# Altium PCB PGA309_Ref_v2.2.PcbDoc
Units mil, origin at the board's own origin, x right, y up, seen from the top; angles counter-clockwise.
Board outline 1000 x 1000 mil, 2 copper layers (Top Layer, Bottom Layer), stack 62 mil thick; 34 components, 25 nets, 97 pads, 22 vias.
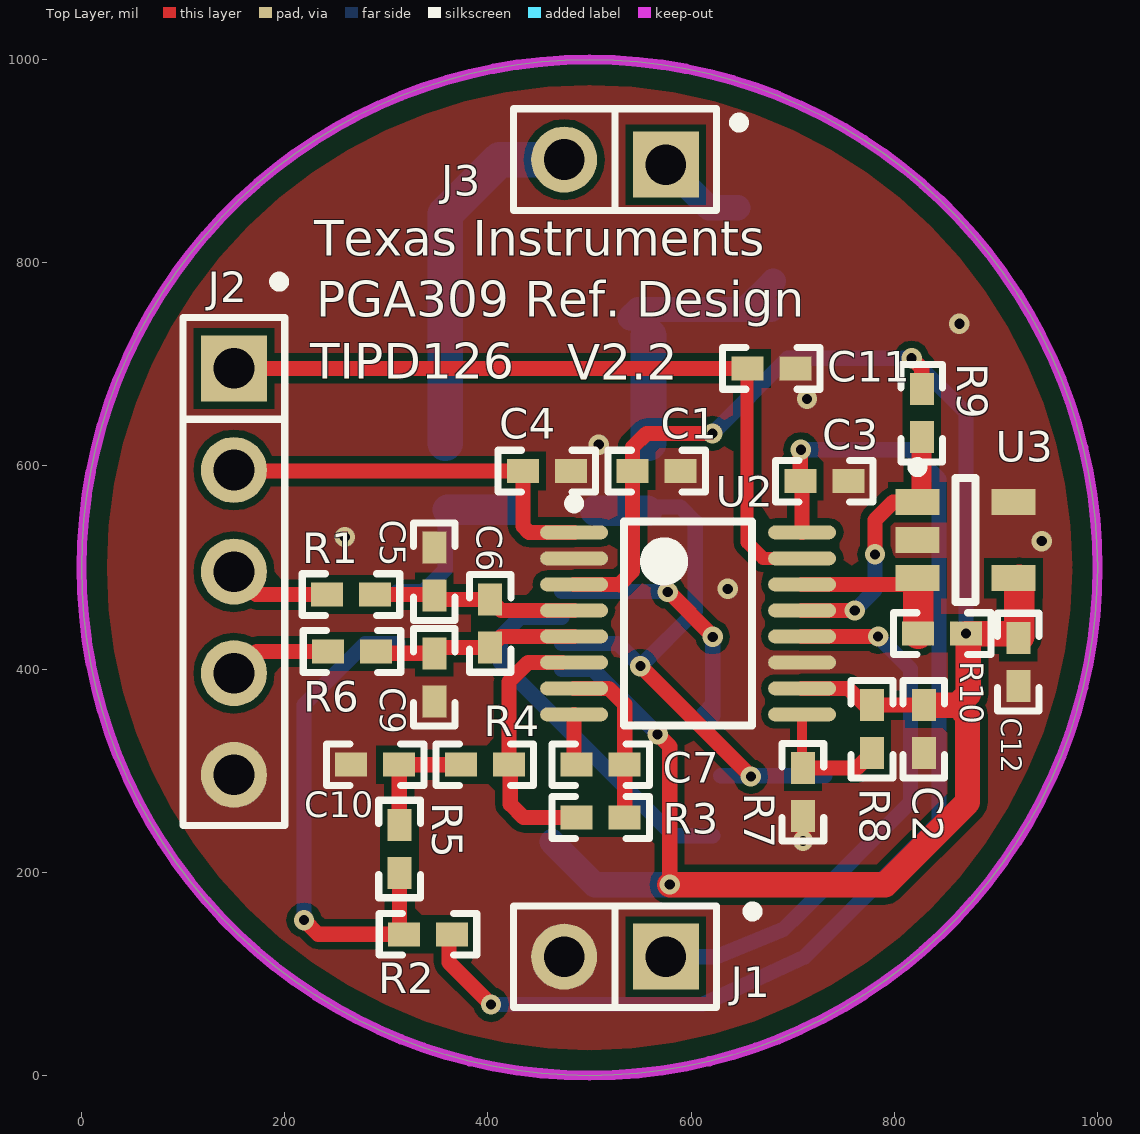
[diagram p0: Top Layer view]
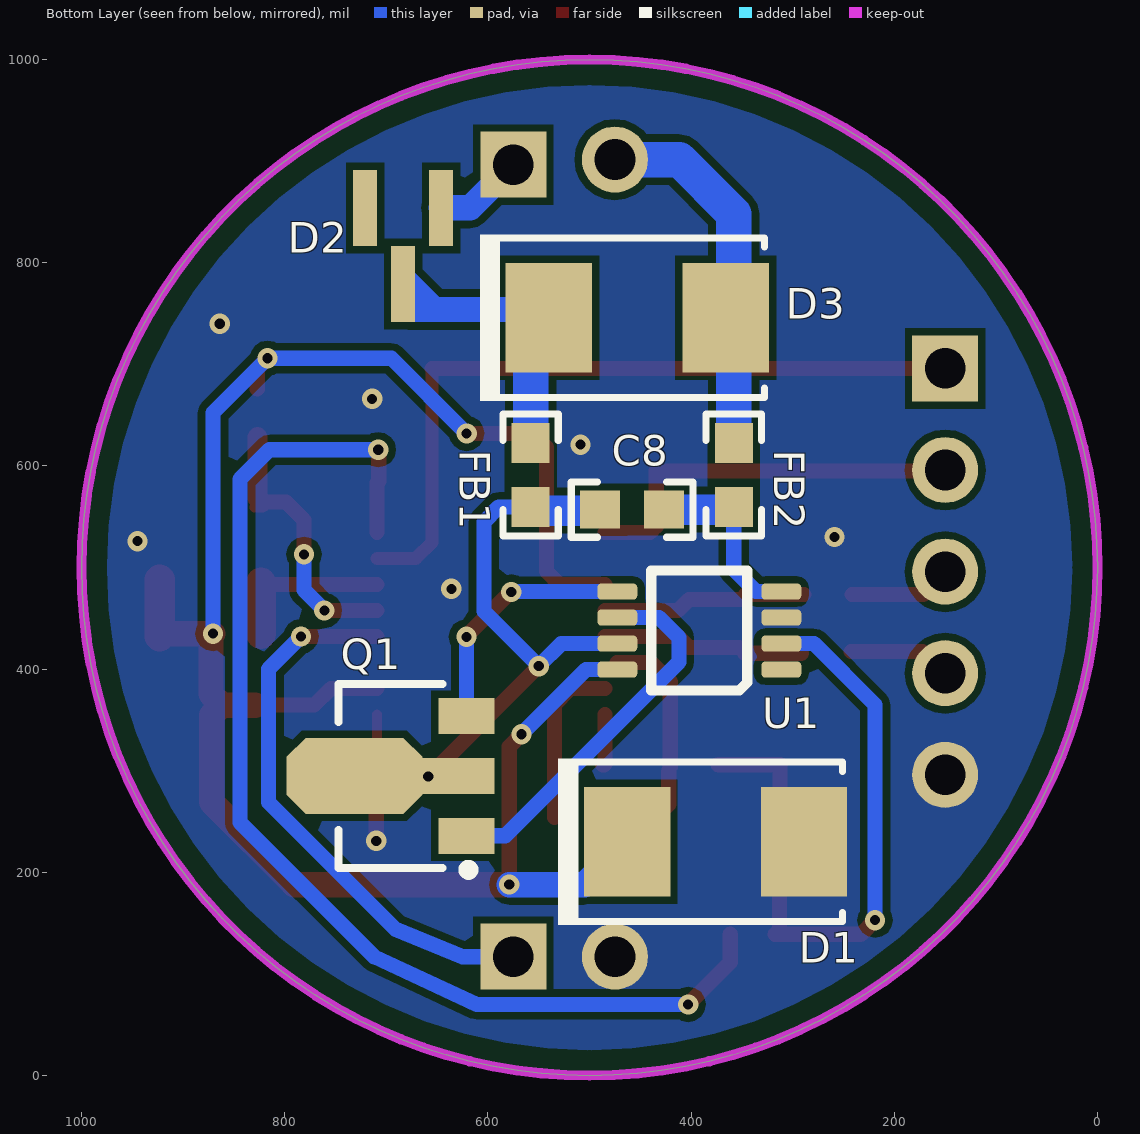
[diagram p1: Bottom Layer view, seen from below]

## Layer stack, top to bottom
Top Layer: signal copper 1.4
Dielectric: core 59.2, FR-4, Dk 4.8
Bottom Layer: signal copper 1.4

## Board outline
500,0 cw(c500,500) 0,500 cw(c500,500) 500,1000 cw(c500,500) 1000,500 cw(c500,500)

## Design rules (kind name [scope] priority, off if disabled: settings)
AcuteAngle [All] p1: minimum=2.00000000000000E+0001 checktracksonly=FALSE
AssemblyTestPointUsage [All] p1: valid=2
Clearance Clearance_BoardEdge_MountingHoles [OnCopper and InComponentClass('Mounting Holes') vs IsKeepOut] p1: gap=30
Clearance Clearance_BoardEdge_Poly [OnCopper and InPoly vs IsKeepOut] p2: gap=20
Clearance Clearance_BoardEdge [OnCopper and Not InComponentClass('Logo') and not InComponentClass('FiducialMark') and not InRegion(1000,500,4000,800) vs IsKeepOut] p3: gap=8
Clearance [All] p4: gap=7
ComponentClearance ComponentClearance_Logo [All] p1: gap=10 collisioncheckmode=3 verticalgap=0 showdistances=FALSE
ComponentClearance ComponentClearance_ScrewToNut [(HasFootprint('NY PMS 440 0025 PH')) vs (HasFootprint('Keystone_1902C'))] p2: gap=5 collisioncheckmode=3 verticalgap=10 showdistances=FALSE
ComponentClearance ComponentClearance_MountingHoles [InComponentClass('Mounting Holes')] p3: gap=25 collisioncheckmode=3 verticalgap=0 showdistances=FALSE
ComponentClearance ComponentClearance_SmallPassives [HasFootprint('0201*') or HasFootprint('0402*') or HasFootprint('0508') or HasFootprint('0603*') or HasFootprint('0612') or HasFootprint('0805*') or HasFootprint('0815*') or HasFootprint('0830*') or HasFootprint('1206*') or HasFootprint('1210*') or HasFootprint('1808*') or HasFootprint('1812*') or HasFootprint('1825*') or HasFootprint('2010*') or HasFootprint('2220*') or HasFootprint('2225*') or HasFootprint('2512*') or HasFootprint('2728*') or HasFootprint('3518*') vs HasFootprint('0201*') or HasFootprint('0402*') or HasFootprint('0508') or HasFootprint('0603*') or HasFootprint('0612') or HasFootprint('0805*') or HasFootprint('0815*') or HasFootprint('0830*') or HasFootprint('1206*') or HasFootprint('1210*') or HasFootprint('1808*') or HasFootprint('1812*') or HasFootprint('1825*') or HasFootprint('2010*') or HasFootprint('2220*') or HasFootprint('2225*') or HasFootprint('2512*') or HasFootprint('2728*') or HasFootprint('3518*')] p4: gap=10 collisioncheckmode=3 verticalgap=10 showdistances=FALSE
ComponentClearance ComponentClearance_THtoSMT [IsThruComponent vs IsSMTComponent] p5: gap=10 collisioncheckmode=3 verticalgap=0 showdistances=FALSE
ComponentClearance ComponentClearance_THtoTH [IsThruComponent vs IsThruComponent] p6: gap=118.11 collisioncheckmode=3 verticalgap=0 showdistances=FALSE
ComponentClearance [All] p7: gap=10 collisioncheckmode=3 verticalgap=10 showdistances=FALSE
DiffPairsRouting [All] p1: maxlimit=100 minlimit=10 mostfreqgap=10 maxuncoupledlength=1000
FabricationTestPointUsage TestPointUsage [All] p1: valid=2 allowmultiple=FALSE
FabricationTestpoint Testpoint [All] p1: side=3 testpointundercomponent=TRUE minsize=40 maxsize=100 preferedsize=60 minholesize=0 maxholesize=40 preferedholesize=32 testpointgrid=1 allowsidetop=TRUE allowsidebottom=TRUE usegrid=TRUE gridtolerance=0.01
FanoutControl Fanout_LCC [IsLCC] p1: bgadir=Out bgaviamode=Centered fanoutstyle=Auto fanoutdirection=Alternating viagrid=1 // Fanout_LCC (Default Rule)
FanoutControl Fanout_BGA [IsBGA] p2: bgadir=Out bgaviamode=Centered fanoutstyle=Auto fanoutdirection=Alternating viagrid=1 // Fanout_BGA (Default Rule)
FanoutControl Fanout_Default [All] p4: bgadir=Out bgaviamode=Centered fanoutstyle=Auto fanoutdirection=Alternating viagrid=1 // Fanout_Default (Default Rule)
FanoutControl Fanout_Small [(CompPinCount < 5)] p5: bgadir=Out bgaviamode=Centered fanoutstyle=Auto fanoutdirection=OutThenIn viagrid=1 // Fanout_Small (Default Rule)
HoleSize [All] p1: absolutevalues=TRUE maxlimit=251 minlimit=8 maxpercent=80.000 minpercent=20.000
MinimumAnnularRing [All] p1: minimumring=5
MinimumSolderMaskSliver MinimumSolderMaskSliver_Logo [InComponentClass('Logo') vs InComponentClass('Logo')] p1: minsoldermaskwidth=0.7
MinimumSolderMaskSliver [All] p2: minsoldermaskwidth=4
PlaneConnect [All] p1: planeconnectstyle=Relief reliefexpansion=10 reliefentries=4 reliefconductorwidth=10 reliefairgap=10
PolygonConnect [All] p1: connectstyle=Direct reliefconductorwidth=10 reliefentries=4 polygonreliefangle="90 Angle" airgapwidth=10
RoutingVias [All] p1: holewidth=16 width=34 viastyle="Through Hole" minholewidth=8 minwidth=8 maxholewidth=40 maxwidth=65
SMDToCorner [All] p1: distance=30000
SilkToSilkClearance [All] p1: silktosilkclearance=3
SilkscreenOverComponentPads [All] p1: minsilkscreentomaskgap=3
SolderMaskExpansion [All] p1: expansion=3
Width [All] p1: maxlimit=100 minlimit=6 preferedwidth=10 checkconnectedcopper=TRUE
14 further rules are at their usual default settings.

## Classes and differential pairs
component class Header: J1 J2 J3

## Components (designator, comment, footprint, x,y, rotation, side; value= is the part's Value field where it differs from the comment)
C1 "Used in BOM report" 0402 566,595 r180 top
C2 "Used in BOM report" 0402 829,341 r90 top
C3 "Used in BOM report" 0402 731,585 r0 top
C4 "Used in BOM report" 0402 458,595 r180 top
C5 "Used in BOM report" 0402 347.2,496 r270 top
C6 "Used in BOM report" 0402 402.2,445 r270 top
C7 "Used in BOM report" 0402 511,306 r0 top
C8 "Used in BOM report" 0603 458,557 r180 bottom
C9 "Used in BOM report" 0402 347.2,392 r270 top
C10 "Used in BOM report" 0402 289,306 r180 top
C11 "Used in BOM report" 0402 679,696 r0 top
C12 "Used in BOM report" 0402 922,407 r270 top
D1 "SMBJ5V0CA" SMB 376,230 r180 bottom
D2 "BAS70-TP" PCBComponent_1 646,854 r0 bottom
D3 "SMBJ40CA" SMB 453,746 r180 bottom
FB1 "Used in BOM report" 0603 558,591 r90 bottom
FB2 "Used in BOM report" 0603 358,591 r90 bottom
J1 "TSW-102-07-G-S" TSW-102-07-G-S#1 525,117 r180 top
J2 "TSW-105-07-G-S" TSW-105-07-G-S 150,496 r270 top
J3 "TSW-102-07-G-S" TSW-102-07-G-S#2 525,901.57 r180 top
Q1 "FCX690BTA" SOT-89-3 696,295 r0 bottom
R1 "Used in BOM report" 0402 265.2,473.39 r0 top
R2 "Used in BOM report" 0402 341,139 r180 top
R3 "Used in BOM report" 0402 511,254 r0 top
R4 "Used in BOM report" 0402 397,306 r0 top
R5 "Used in BOM report" 0402 313,223 r90 top
R6 "Used in BOM report" 0402 266.2,417.39 r0 top
R7 "Used in BOM report" 0402 710,279 r90 top
R8 "Used in BOM report" 0402 778,341 r270 top
R9 "Used in BOM report" 0402 827,652 r90 top
R10 "Used in BOM report" 0402 847,435 r0 top
U1 "XTR117" DGK-8 392,438 r0 bottom
U2 "PGA309" PW0016A_N 597,445 r0 top
U3 "24LC16BE" MF05A_N 870,527 r0 top

## Footprints (in the part's own frame and the unit in brackets; to place one, negate y for a bottom-side part, rotate by r counter-clockwise, add the part's x,y. Pads: shape width x height; smd on the part's side, far side on the other; paste and mask are expansions set on the pad)
0402 [mm] "0402 from SM-752 data"
  rect 0.8x0.6 smd: 1(-0.6,0) 2(0.6,0)
  silkscreen extent -1.22,-0.52 1.22,0.52, body extent -0.55,-0.3 0.55,0.3, height 0.6
0603 [mm] "0603 from SM-752 data"
  rect 1x0.95 smd: 1(-0.8,0) 2(0.8,0)
  silkscreen extent -1.52,-0.69 1.52,0.69, body extent -0.87,-0.47 0.87,0.47, height 0.85
DGK-8 [mm] "MSOP-8, SMD, 0.65mm PITCH"
  rrect50% 1x0.4 smd: 1(-2.05,0.975) 2(-2.05,0.325) 3(-2.05,-0.325) 4(-2.05,-0.975) 5(2.05,-0.975) 6(2.05,-0.325) 7(2.05,0.325) 8(2.05,0.975)
  silkscreen extent -1.2,-1.5 1.2,1.5
MF05A_N [mm] "SOT23, 5-Leads, Body 2.9x1.6mm, Pitch 0.95mm, Lead Span 2.8mm, IPC Medium Density"
  rect 1.1x0.65 smd: 1(-1.2,0.95) 2(-1.2,0) 3(-1.2,-0.95) 4(1.2,-0.95) 5(1.2,0.95)
  silkscreen extent -1.32,-1.55 0.25,1.95, body extent -0.9,-1.55 0.9,1.55, height 1.19
PCBComponent_1 [mm]
  rect 0.6x1.9 smd: 1(0,0) 2(1.9,0) 3(0.95,1.9)
PW0016A_N [mm] "TSOP, 16-Leads, Body 5x4.4mm, Pitch 0.65mm, IPC Medium Density"
  oval 1.7x0.35 smd: 1(-2.85,2.275) 2(-2.85,1.625) 3(-2.85,0.975) 4(-2.85,0.325) 5(-2.85,-0.325) 6(-2.85,-0.975) 7(-2.85,-1.625) 8(-2.85,-2.275) 9(2.85,-2.275) 10(2.85,-1.625) 11(2.85,-0.975) 12(2.85,-0.325) 13(2.85,0.325) 14(2.85,0.975) 15(2.85,1.625) 16(2.85,2.275)
  silkscreen extent -2.97,-2.55 1.6,3.12, body extent -2.25,-2.55 2.25,2.55, height 1.2
SMB [mil] "Molded Diode, 2-Leads, Body 5.4x3.6mm, IPC Medium Density, based on OnSemi component dimensions"
  rect 85x107.99 smd: 1(-87.01,0) 2(87.01,0)
  silkscreen extent -155,-82 125,82, body extent -106,-71 106,71, height 91
SOT-89-3 [mm] "SOT, 3-Leads, Body 4.6 x 2.6 mm, Pitch 1.5mm"
  rect 1.4x0.9 smd: 1(-1.9,1.5) 3(-1.9,-1.5)
  rect 1.8x0.9 smd: 2(-1.7,0)
  oct 3.4x1.9 smd: 4(0.9,0)
  silkscreen extent -2.07,-2.3 1.3,2.47, body extent -2.42,-2.28 1.83,2.32, height 1.62
TSW-102-07-G-S#1 [mm] "Samtec 100mil, 1x2, 230 mil above insulator"
  rect 1.65x1.65 hole 1.016 mask+0: 1(-1.27,0)
  round 1.65 hole 1.016 mask+0: 2(1.27,0)
  silkscreen extent -3.57,-1.27 2.54,1.27, body extent -2.54,-1.27 2.54,1.27, height 8.38
TSW-102-07-G-S#2 [mm] "Samtec 100mil, 1x2, 230 mil above insulator"
  rect 1.65x1.65 hole 1.016 mask+0: 1(-1.27,0.127)
  round 1.65 hole 1.016 mask+0: 2(1.27,0)
  silkscreen extent -3.23,-1.27 2.54,1.27, body extent -2.54,-1.27 2.54,1.27, height 8.38
TSW-105-07-G-S [mm] "Samtec 100mil, 1x5, 230 mil above insulator"
  rect 1.65x1.65 hole 1.016 mask+0: 1(-5.08,0)
  round 1.65 hole 1.016 mask+0: 2(-2.54,0) 3(0,0) 4(2.54,0) 5(5.08,0)
  silkscreen extent -7.37,-1.27 6.35,1.27, body extent -6.35,-1.27 6.35,1.27, height 8.38

## Part data
C1 C2 C3 C4 C5 C6 C7 C8 C9 C10 C11 C12: library part Capacitor, "CAP, CERM, xxxF, xxV, [TempCo], xx%, [PackageReference]"
D1 D3: library part TVS_BI_SMB
D2: library part Component_1
FB1 FB2: library part Ferrite_Bead, "300mA Ferrite Bead, 600 ohm @ 100MHz"
J1 J3: "Header, TH, 100mil, 2x1, Gold plated, 230 mil above insulator"
J2: "Header, TH, 100mil, 5x1, Gold plated, 230 mil above insulator"
Q1: library part "FCX690BTA, Diodes Inc.", "Transistor, NPN, 45V, 1A, SOT-89"
R1 R2 R3 R4 R5 R6 R7 R8 R9 R10: library part Resistor, "RES, xxx ohm, x%, xW, [PackageReference]"
U1: library part XTR117_MSOP
U2: library part PGA309_TSSOP16
U3: library part 24LC16BE_SOT-23

## Via types
v1: diameter 20, hole 10, Top Layer to Bottom Layer, 22 vias

## Nets (pads, with @x,y where several pads share a name; then routed paths per layer and width w, separated by ;. In a path a pad name is that pad's centre, name@x,y a point inside that pad or via, vN(x,y) a via of type N, cw(c..) or ccw(c..) an arc to the next point about the centre after c; other vN are vias at no path point)
1W: J1.1 U2.12 | length 559.9
  Top Layer w15: U2.12 v1(784,432.2)
  Bottom Layer w10: J1.1@578,119 J1.1@585.5,126.5
  Bottom Layer w15: J1.1 625,117 691,144 706,159 816,269 816,400.2 v1(784,432.2)
GND: C1.1 C2.1 C3.2 C4.1 C5.1 C9.2 C10.2 C11.2 C12.2 D1.2 J1.2 J2.5 R7.1 U1.3 U2.2 U2.11 U3.2 U3.5 | length 25.4
  Top Layer w15: v1(710,231) R7.1 ; v1(945,526) v1@945,527
  other v1: 636,479 259,530 509,621 714,666 864,740
LOOP+: D2.1 J3.1 | length 88.6
  Bottom Layer w25: J3.1 617.57,854 D2.1
LOOP-: D3.2 FB2.2 J3.2 | length 369.5
  Bottom Layer w25: J3.2 471.57,901.57 J3.2@475,905
  Bottom Layer w35: FB2.2 358,738.01 358,848 411.57,901.57 J3.2@471.57,901.57
NetC5_2: C5.2 C6.1 R1.2 U2.4 | length 202.4
  Top Layer w10: C5.2@346.2,473.39 C5.2 C5.2@350.96,468.62
  Top Layer w15: R1.2 C5.2@346.2,473.39 ; C5.2@350.96,468.62 C6.1 413.03,457.8 U2.4
NetC6_2: C6.2 C9.1 R6.2 U2.5 | length 202.6
  Top Layer w10: R6.2 R6.2@291.59,415.62 ; C9.1 C9.1@352.96,421.38
  Top Layer w15: R6.2@291.59,415.62 C9.1 ; C9.1@352.96,421.38 C6.2 413.03,432.2 U2.5
NetC7_1: C7.1 U2.8 | length 51.3
  Top Layer w15: C7.1@484.8,306.58 C7.1@485.38,306 ; U2.8 484.8,308.58 C7.1
NetC7_2: C7.2 R3.2 U2.7 | length 167.7
  Top Layer w15: U2.7 518.98,381.02 534.62,365.38 C7.2 R3.2
NetC8_1: C8.1 FB1.1 Q1.2 Q1.4 U1.7 | length 610.5
  Top Layer w15: v1(550,403) v1(658.73,294.27)
  Bottom Layer w15: U1.7 527.8,425.2 v1(550,403) 604,457 604,545 589.5,559.5 FB1.1 ; Q1.2 Q1.4
  Bottom Layer w30: C8.1@505.5,556 FB1.1@557,556
NetC8_2: C8.2 FB2.1 U1.4 | length 183.2
  Bottom Layer w15: U1.4 336.39,476.39 358,498 FB2.1
  Bottom Layer w30: FB2.1@360.5,557 C8.2
NetC10_1: C10.1 R4.1 R5.2 | length 120.3
  Top Layer w10: R5.2@312.62,247 R5.2
  Top Layer w15: R5.2@312.62,247 C10.1 R4.1
NetD2_3: D2.3 D3.1 FB1.2 | length 287
  Bottom Layer w25: D3.1 548,753.99 653.2,753.99 ; D2.3@679,753.99 653.2,753.99 ; D2.3@680.9,781.7 653.2,753.99
  Bottom Layer w35: FB1.2 D3.1@558,728.01
NetQ1_1: Q1.1 U1.6 | length 373.1
  Bottom Layer w15: U1.6 431.62,450.8 412,431.17 412,407 583.06,235.94 Q1.1
NetQ1_3: Q1.3 U1.5 | length 257.7
  Top Layer w15: v1(577,476) 578,476 v1@621.7,432.3
  Bottom Layer w15: U1.5 576.61,476.39 v1(577,476) ; Q1.3@612.2,356.06 Q1.3@621.2,365.06 ; Q1.3 Q1.3@621.2,365.06 ; v1(621.2,431.8) Q1.3@621.2,365.06
NetR2_2: R2.2 R5.1 U1.2 | length 494.4
  Top Layer w10: R2.2@311.62,139 R2.2@313,140.38
  Top Layer w15: v1(219,153) 233,139 311.62,139 R2.2 ; R2.2@313,140.38 R5.1
  Bottom Layer w15: v1(219,153) 219,365 279.2,425.2 U1.2
NetR3_1: R3.1 R4.2 U2.6 | length 250.7
  Top Layer w10: R4.2@418.12,303.5 R4.2@422,299.62
  Top Layer w15: R4.2 420.62,387.62 439.61,406.61 U2.6@473,406.61 ; R4.2@422,299.62 422,267 435,254 R3.1
NetR7_2: R7.2 R8.2 U2.9 | length 127.3
  Top Layer w10: U2.9 709.2,303.42 R7.2
  Top Layer w15: R7.2 763.24,302.62 R8.2
SCL: R9.1 U2.13 U3.1 | length 272.1
  Top Layer w10: U3.1@822.76,559.4 U3.1@829.76,559.4 ; R9.1@826.76,629.38 826.76,628.13 R9.1
  Top Layer w15: U2.13 v1(761,457.8) ; v1(781,513) 781,546.8 798.6,564.4 U3.1
  Top Layer w20: U3.1 826.76,568.4 R9.1@826.76,628.13
  Bottom Layer w15: v1(761,457.8) 781,477.8 v1(781,513)
SDA: R10.1 U2.14 U3.3 | length 165.3
  Top Layer w10: U3.3@820.54,483.39 822.76,485.6 U3.3@823.38,484.98
  Top Layer w15: U2.14 U3.3@820.54,483.39
  Top Layer w30: R10.1 U3.3@823.38,484.98
VEXC: C4.2 J2.2 U2.1 | length 391.7
  Top Layer w15: J2.2@150,595 C4.2 434.38,540.62 440.43,534.57 U2.1
VIN1: J2.3 R1.1 | length 100.5
  Top Layer w15: J2.3@150,495 171.61,473.39 R1.1
VIN2: J2.4 R6.1 | length 101.9
  Top Layer w15: J2.4@150,395 172.39,417.39 R6.1
VREF: C3.1 R2.1 U2.16 | length 1160.4
  Top Layer w10: C3.1 C3.1@709.2,583.17
  Top Layer w15: R2.1@361.62,139 361.62,111.38 v1(403,70) ; C3.1 v1@707.38,616 ; U2.16 C3.1@709.2,583.17
  Bottom Layer w15: v1(403,70) 611,70 712,117 844,249 844,587 815,616 v1(708,616)
VREG: C1.2 C2.2 C12.1 D1.1 R8.1 R9.2 R10.2 U1.8 U2.3 U2.10 U3.4 | length 2008.8
  Top Layer w10: 529.39,480.61 529.39,483.39 ; U3.4@921.24,489.6 U3.4@923,487.84 ; C12.1@923,432.38 C12.1@929.38,426
  Top Layer w15: U2.3 529.39,483.39 542.38,496.38 C1.2 542.38,618.38 556,632 v1(621,632) ; v1(567,336) 579,324 v1(579,188) ; U2.10 754.6,381.02 771,364.62 C2.2 ; v1(817,706) 827,696 R9.2
  Top Layer w25: v1(579,188) 791,188 872,269 872,354.62 862,364.62 ; C2.2 862,364.62 ; v1(870.62,435) C12.1@920.38,435 ; R10.2@872.62,433 872.62,375.24 862,364.62
  Top Layer w30: C12.1@923,432.38 U3.4@923,487.84
  Bottom Layer w15: U1.8 503.39,399.61 v1(567,336) ; v1(621,632) 695,706 v1(817,706) 870.62,652.38 v1(870.62,435)
  Bottom Layer w25: D1.1 505.01,188 v1(579,188)
VTEMP: C11.1 J2.1 U2.15 | length 736.8
  Top Layer w13: C11.1@655,696 655,525 671.02,508.98 U2.15
  Top Layer w15: J2.1 C11.1@655,696
pads on no net: D2.2 U1.1

## Polygon pours and split planes (outlines as drawn)
GND on Bottom Layer "Bottom Layer-No Net" (solid, remove dead copper, pour order 3): -80,1135 1321,1066 924,-175 -195,-100 -70,1135
GND on Top Layer "Top Layer-No Net" (solid, remove dead copper, pour order 4): -55,1053 1134,1053 1134,24 954,-156 922,-124 -103,-124 -103,1001 -55,1049

## Keep-outs
Keep-Out Layer:
  the board outline again, w10
  text ".Layer_Name" at 577,-858.49 h60

## Other copper
Top Layer:
  text ".Layer_Name" at 577,-858.49 h60
Bottom Layer:
  text ".Layer_Name" at 577,-858.49 h60

## Silkscreen, mask and mechanical layers (free items; w line width, h text height)
Top Overlay:
  text "Texas Instruments" at 229,807 h35
  text "PGA309 Ref. Design" at 231,747 h35
  text "TIPD126" at 225,686 h35
  text "V2.2" at 478,685 h35
  text ".Layer_Name" at 577,-858.49 h60
Bottom Overlay:
  text ".Layer_Name" at 577,-858.49 h60
Top Paste:
  text ".Layer_Name" at 577,-858.49 h60
Bottom Paste:
  text ".Layer_Name" at 577,-858.49 h60
Top Solder:
  text ".Layer_Name" at 577,-858.49 h60
  text ".Layer_Name" at 577,-858.49 h60
Bottom Solder:
  text ".Layer_Name" at 577,-858.49 h60
Drill Guide:
  text ".Layer_Name" at 577,-858.49 h60
M1 Board Outline:
  circle w10: c500,500 r500
  text ".Layer_Name" at 577,-858.49 h60
M2 Board Dimensions:
  rectangle: 124.5,-410.5 499.5,-285.5
  rectangle: -0.5,-285.5 124.5,-160.5
  lines w7: -0.5,-285.5 999.5,-285.5 ; 124.5,-410.5 124.5,-160.5 ; 249.5,-410.5 249.5,-160.5 ; 499.5,-410.5 499.5,-160.5 ; 749.5,-410.5 749.5,-160.5 ; -0.5,-410.5 -0.5,-160.5 999.5,-160.5 999.5,-410.5 -0.5,-410.5
  lines w10: -120,60 -100,0 ; -120,940 -100,1000 ; -110,0 -90,0 ; -110,1000 -90,1000 ; -100,224.08 -100,0 ; -100,775.92 -100,1000 ; -80,60 -100,0 ; -80,940 -100,1000 ; 0,-110 0,-90 ; 60,-120 0,-100 ; 60,-80 0,-100 ; 224.08,-100 0,-100 ; 775.92,-100 1000,-100 ; 940,-120 1000,-100 ; 940,-80 1000,-100 ; 1000,-110 1000,-90
  text "1000 (mil)" at -64.01,234.08 h60 r90
  text "1000 (mil)" at 234.08,-135.99 h60
  text ".Layer_Name" at 577,-858.49 h60
M3 3D STEP Top:
  text ".Layer_Name" at 577,-858.49 h60
M4 3D STEP Bottom:
  text ".Layer_Name" at 577,-858.49 h60
M5 Assembly Top:
  lines w7: 5139,110.5 6264,110.5 ; 5139,233 6261.5,233 ; 5454,-9.5 5454,353 ; 5839,-9.5 5139,-9.5 ; 5839,353 5139,353 ; 5139,-9.5 5139,353 ; 5139,-9.5 6264,-9.5 6264,353 5139,353
  lines w10: -292,-930.17 6308,-930.17 ; -292,-726.83 6310,-726.83 ; -292,-523.5 -292,-1133.5 3713,-1133.5 6310,-1133.5 6310,-523.5 -291.5,-523.5 -291.5,-1133.5 1284,-1133.5 ; 2173,-1133.5 2173,-523.5 ; 3440,-726.83 3440,-523.5 ; 4280,-726.83 4280,-523.5 ; 4902,-1140 4902,-937.17
  text "TABLE 1" at 5526.5,388 h30
  text "Variant" at 5164,278 h30
  text "Label text" at 5599,278 h30
  text "001" at 5231.5,158 h30
  text "ChangeMe!" at 5509,155.5 h30
  text "002" at 5231.5,33 h30
  text "ChangeMe!" at 5504,30.5 h30
  text "COMPONENTS MARKED 'DNP' SHOULD NOT BE POPULATED, AND MAY NOT BE IN BILL OF MATERIALS" at 1153.5,-318.5 h60
  text "ASSEMBLY VARIANT:" at 1153,-434 h60
  text ".VariantName" at 2189,-434 h60
  text "PCB VIEWED FROM TOP SIDE" at -228.5,-655.67 h60
  text "BOARD #:" at 2248,-655.67 h60
  text ".PRJ_Number" at 2793.5,-655.67 h60
  text "REV:" at 3638,-655.67 h60
  text ".PCB_Rev" at 3929.5,-655.67 h60
  text "SVN REV:" at 4476,-655.67 h60
  text ".VersionControl_RevNumber" at 4982,-655.67 h60
  text "IGNORE ->" at -228.5,-858.49 h60
  text "PLOT NAME =" at -228.5,-1064.34 h60
  text ".plot_File_Name" at 577,-1064.34 h60
  text "GENERATED    :" at 2250,-1064.34 h60
  text ".Print_Date" at 3119.5,-1064.34 h60
  text ".Print_Time" at 3848.5,-1064.34 h60
  text "TEXAS INSTRUMENTS" at 5113,-1064.34 h60
M6 Assembly Bottom:
  lines w10: -292.5,-727.33 6309.5,-727.33 ; -290.5,-930.67 6309.5,-930.67 ; 1115.5,-1140.5 1115.5,-937.67 ; 1737.5,-727.33 1737.5,-524 ; 2577.5,-727.33 2577.5,-524 ; 3844.5,-1134 3844.5,-524 ; 4733.5,-1134 6309,-1134 6309,-524 -292.5,-524 -292.5,-1134 2304.5,-1134 6309.5,-1134 6309.5,-524
  text "COMPONENTS MARKED 'DNP' SHOULD NOT BE POPULATED, AND MAY NOT BE IN BILL OF MATERIALS" at 6102,-318 h60
  text ".VariantName" at 5058,-434 h60
  text "ASSEMBLY VARIANT:" at 6097,-434 h60
  text ".VersionControl_RevNumber" at 1035.5,-656.17 h60
  text "SVN REV:" at 1541.5,-656.17 h60
  text ".PCB_Rev" at 2088,-656.17 h60
  text "REV:" at 2379.5,-656.17 h60
  text ".PRJ_Number" at 3224,-656.17 h60
  text "BOARD #:" at 3769.5,-656.17 h60
  text "PCB VIEWED FROM BOTTOM SIDE" at 6246,-656.17 h60
  text "IGNORE ->" at 2547.85,-858.49 h60
  text "TEXAS INSTRUMENTS" at 904.5,-1064.84 h60
  text ".Print_Time" at 2169,-1064.84 h60
  text ".Print_Date" at 2898,-1064.84 h60
  text "GENERATED    :" at 3767.5,-1064.84 h60
  text ".plot_File_Name" at 5440.5,-1064.84 h60
  text "PLOT NAME =" at 6246,-1064.84 h60
M9 Title Sheet:
  drawing of 57 lines, arcs and shapes, not listed
  text "1" at 739.84,8036.5 h70
  text "2" at 3235.5,8036.5 h70
  text "3" at 5724.84,8036.5 h70
  text "4" at 8231.51,8036.5 h70
  text "5" at 10730.5,8036.5 h70
  text "6" at 13235.5,8036.5 h70
  text "A" at -416.5,6893.5 h70
  text "A" at 14383.5,6893.5 h70
  text "B" at -416.5,4513.5 h70
  text "B" at 14383.5,4513.5 h70
  text "C" at -416.5,2138.5 h70
  text "C" at 14383.5,2138.5 h70
  text "PROJECT TITLE:" at 11343.5,277.5 h45
  text ".PRJ_Title" at 11393.5,144.17 h70
  text "DESIGNED FOR:" at 11343.5,-23.5 h45
  text ".PRJ_Customer" at 11393.5,-163.5 h70
  text "D" at -416.5,-231.5 h70
  text "D" at 14383.5,-231.5 h70
  text "FILE NAME:" at 11343.5,-323.5 h45
  text ".PCB_File_Name_No_Path" at 11393.5,-443.5 h70
  text "Texas Instruments (TI) and/or its licensors do not warrant the accuracy or completeness of this specification" at 6374,-605.34 h45
  text "ENGINEER:" at 11343.5,-613.5 h45
  text "LAYOUT BY:" at 12848.5,-613.5 h45
  text "or any information contained therein. TI and/or its licensors do not warrant that this design will meet" at 6329.01,-718 h45
  text ".PRJ_Engineer" at 11393.5,-768.49 h70
  text ".PCB_Layout" at 12899,-768.49 h70
  text "the specifications, will be suitable for your application or fit for any particular purpose, or will operate in" at 6329.01,-830.67 h45
  text ".Layer_Name" at 577,-858.49 h60
  text "ALTIUM DESIGNER VERSION:" at 12848.5,-923.5 h45
  text "an implementation. TI and/or its licensors do not warrant that the design is production worthy. You should" at 6329.01,-943.33 h45
  text "completely validate and test your design implementation to confirm the system functionality for your application." at 6374,-1056 h45
  text ".print_Scale" at 11393.5,-1056.83 h70
  text ".Application_BuildNumber" at 12899,-1056.83 h70
  text "1" at 739.84,-1263.5 h70
  text "2" at 3235.5,-1263.5 h70
  text "3" at 5724.84,-1263.5 h70
  text "4" at 8231.51,-1263.5 h70
  text "5" at 10730.5,-1263.5 h70
  text "6" at 13235.5,-1263.5 h70
M10 Fab Notes:
  drawing of 203 lines, arcs and shapes, not listed
  text "DESIGN INFORMATION" at 12381.02,6810 h60
  text "(REFER ALSO ARRAY/PANEL PROFILING INFORMATION)" at 12019.46,6648.29 h60
  text "BOARD SIZE" at 11333.46,6644 h60
  text "3450MIL" at 11795.78,6516.18 h60
  text "X" at 12301.46,6516.18 h60
  text "4950MIL" at 12532.78,6516.18 h60
  text "Number of Layers :" at 11736.46,6319 h60
  text "2" at 12831.27,6309 h60
  text "MIN. TRACK WIDTH:" at 11736.46,6180 h60
  text "8" at 12832.7,6180 h60
  text "MIL" at 12987.46,6180 h60
  text "MIN. CLEARANCE:" at 11736.46,6048 h60
  text "8" at 12832.7,6048 h60
  text "MIL" at 12987.46,6048 h60
  text "MIN. VIA PAD SIZE:" at 11736.46,5916 h60
  text "24" at 12802.71,5916 h60
  text "MIL" at 12987.46,5916 h60
  text "0.05mm (2MIL)" at 12431.46,5774.29 h60
  text "MINIMUM ANNULAR RING" at 11407.23,5770 h60
  text "EXTERNAL" at 13139.46,5770 h60
  text "PER" at 11607.23,5652 h60
  text "IPC-D-275 CLASS 2 LEVEL C" at 11827.23,5652 h60
  text "MIL, HOLES" at 13315.46,5539.71 h60
  text "+/-" at 12923,5539 h60
  text "+/-" at 13777,5539 h60
  text "REGISTRATION TOLERANCES:" at 11407.23,5534 h60
  text "METAL" at 12607,5534 h60
  text "5" at 13183.2,5534 h60
  text "3" at 14016.2,5534 h60
  text "MIL" at 14132.46,5534 h60
  text "MATERIAL:" at 11332.46,5324.54 h60
  text "FR-4 High Tg" at 12318.9,5184.21 h60
  text "FR-4" at 11793.46,5175.64 h60
  text "X" at 12165.46,5175.64 h60
  text "OTHER" at 13241.46,5175.64 h60
  text "62 MIL (1.6mm) +/-10%" at 12073.56,5012.92 h60
  text "THICKNESS:" at 11407.23,5008.64 h60
  text "X" at 11945.4,5008.64 h60
  text "OTHER" at 13358.46,5008.64 h60
  text "TOLERANCE:" at 11407.23,4850.64 h60
  text "X" at 12246.53,4850.64 h60
  text "ANSI IPC-6012 TYPE 3 CLASS 2" at 12433.48,4850.64 h60
  text "OTHER +/-" at 12433.46,4694.64 h60
  text "BOW & TWIST:" at 11407.23,4537.64 h60
  text "X" at 12246.53,4537.64 h60
  text "ANSI IPC-6012 TYPE 3 CLASS 2" at 12433.48,4537.64 h60
  text "OTHER +/-" at 12433.46,4379.13 h60
  text "COPPER THICKNESS (FINISHED):" at 11332.46,4243.64 h60
  text "1.4MIL (1oz)" at 12212.46,4090.92 h60
  text "2MIL (1.4oz)" at 12979.46,4090.92 h60
  text "2.8MIL (2oz)" at 13706.46,4090.92 h60
  text "OUTER:" at 11689.46,4086.64 h60
  text "X" at 12084,4086 h60
  text "1.4MIL (1oz)" at 12562.46,3933.92 h60
  text "2.8MIL (2oz)" at 13406.46,3933.92 h60
  text "INNER SIGNAL:" at 11689.46,3929.64 h60
  text "X" at 12435.42,3929.64 h60
  text "DRILLING:" at 11332.46,3790.64 h60
  text "REFERENCE:" at 11407.23,3673.64 h60
  text "X" at 12055.46,3673.64 h60
  text "AS SHOWN" at 12242.46,3673.64 h60
  text "X" at 12956.46,3673.64 h60
  text "NC_DRILL FILES" at 13093.46,3673.64 h60
  text "PTH MIN COPPER THICKNESS:" at 11407.23,3515.64 h60
  text "X" at 12757.46,3515.64 h60
  text "1MIL" at 12894.46,3515.64 h60
  text "OTHER" at 13391.46,3515.64 h60
  text "BOARD FINISH:" at 11332.46,3356.64 h60
  text "SILKSCREEN:" at 11487.68,3238.64 h60
  text "X" at 12436.46,3238.64 h60
  text "TOP" at 12562.46,3238.64 h60
  text "X" at 12946.46,3238.64 h60
  text "BOTTOM" at 13073.46,3238.64 h60
  text "SILKSCREEN COLOR:" at 11487.68,3071.64 h60
  text "X" at 12435.42,3071.64 h60
  text "WHITE" at 12562.46,3071.64 h60
  text "OTHER" at 13073.46,3071.64 h60
  text "SOLDER RESIST COLOR:" at 11487.68,2901.64 h60
  text "X" at 12055.42,2742.44 h60
  text "GREEN" at 12182.46,2742.44 h60
  text "BLUE" at 12773.46,2742.44 h60
  text "OTHER" at 13311.46,2742.44 h60
  text "IMMERSION GOLD (ENIG)" at 12393.46,2553.92 h60
  text "SURFACE FINISH:" at 11332.46,2549.64 h60
  text "X" at 12206.51,2549.64 h60
  text "Pb-FREE HASL" at 13625.75,2549.64 h60
  text "OTHER" at 12393.46,2392.64 h60
  text "ARRAY/PANEL:" at 11332.46,2213.64 h60
  text "CUT AND TRIM PER MECH LAYER 1" at 12393.46,2209.35 h60
  text "N.C. ROUTE" at 12393.46,2057.64 h60
  text "X" at 13072.46,2057.64 h60
  text "V. SCORE" at 13259.46,2057.64 h60
  text "CERTIFICATION:" at 11332.46,1920.64 h60
  text "MATERIALS AND WORKMANSHIP FOR ALL PCBS" at 12057.46,1920.64 h60
  text "TO MEET OR EXCEED THE REQUIREMENTS OF:" at 12057.46,1822.64 h60
  text "X" at 11683.96,1686.13 h60
  text "ANSI IPC-A-600F CLASS ->" at 11822.96,1686.13 h60
  text "X" at 13462.02,1686.13 h60
  text "2" at 13580.96,1686.14 h60
  text "1" at 13265.96,1684.64 h60
  text "3" at 13934.96,1684.64 h60
  text "X" at 11686.02,1526.64 h60
  text "UL 94V-0" at 11822.96,1526.64 h60
  text "X" at 12498.02,1526.64 h60
  text "RoHS" at 12634.96,1526.64 h60
  text "OTHER" at 13279.36,1526.64 h60
  text "PER ORDER" at 13676.42,1526.64 h60
  text "ADDITIONAL REQUIREMENTS:" at 11332.46,1385.64 h60
  text "MICROSECTION:" at 11407.23,1270.64 h60
  text "YES" at 12312.96,1270.64 h60
  text "REQUIRED" at 13174.46,1114.49 h60
  text "BARE BOARD ELEC. TEST:" at 11407.23,1111.64 h60
  text "NONE" at 12712.96,1111.64 h60
  text "X" at 13047.46,1111.64 h60
  text "PER ORDER" at 13766.46,1111.64 h60
  text "MANUFACTURER'S ID/LOGO:" at 11407.23,954.64 h60
  text "RAIL" at 12872.96,950.35 h60
  text "X" at 13247.46,950.35 h60
  text "METAL" at 13364.77,950.35 h60
  text "SILK" at 13876.46,950.35 h60
  text ".Layer_Name" at 577,-858.49 h60
M11 Gerber Information:
  lines w10: -292,-930.17 6308,-930.17 ; -292,-726.83 6310,-726.83 ; -292,-523.5 -292,-1133.5 3713,-1133.5 6310,-1133.5 6310,-523.5 -291.5,-523.5 -291.5,-1133.5 1284,-1133.5 ; 2173,-1133.5 2173,-523.5 ; 3440,-726.83 3440,-523.5 ; 4280,-726.83 4280,-523.5 ; 4902,-1140 4902,-937.17
  text "ALL ARTWORK VIEWED FROM TOP SIDE" at -228.5,-655.67 h60
  text "BOARD #:" at 2248,-655.67 h60
  text ".PRJ_Number" at 2793.5,-655.67 h60
  text "REV:" at 3638,-655.67 h60
  text ".PCB_Rev" at 3929.5,-655.67 h60
  text "SVN REV:" at 4476,-655.67 h60
  text ".VersionControl_RevNumber" at 4982,-655.67 h60
  text "LAYER NAME =" at -228.5,-858.49 h60
  text "PLOT NAME =" at -228.5,-1064.34 h60
  text ".plot_File_Name" at 577,-1064.34 h60
  text "GENERATED    :" at 2250,-1064.34 h60
  text ".Print_Date" at 3119.5,-1064.34 h60
  text ".Print_Time" at 3848.5,-1064.34 h60
  text "TEXAS INSTRUMENTS" at 5113,-1064.34 h60
M12 Stackup:
  lines w6: 11360,7460 13910,7460 ; 11360,7564.4 13910,7564.4 ; 11300,6975 ccw(c11334,6975) 11334,6941 13936,6941 ccw(c13936,6975) 13970,6975 13970,7681 ccw(c13936,7681) 13936,7715 11334,7715 ccw(c11334,7681) 11300,7681 11300,6975
  text "The Stackup Legend below this is static." at 11605.5,7874.5 h60
  text "If you change the stackup, update the Legend." at 11615.5,7784.5 h60
  text "Layer Stack Up Detail for: Ref_Design.PcbDoc" at 11360,7597.1 h57
  text "Layer" at 11360,7525.4 h24
  text "Gerber" at 12255.81,7525.4 h24
  text "Copper" at 12819.33,7525.4 h24
  text "Dielectric" at 13422.04,7525.4 h24
  text "Name" at 11360,7477.4 h24
  text "Document" at 12255.81,7477.4 h24
  text "Thickness" at 12819.33,7477.4 h24
  text "Material" at 13422.04,7477.4 h24
  text "Top Solder Mask" at 11360,7384.44 h34
  text "(.GTS)" at 12255.81,7384.44 h34
  text "Solder Resist" at 13422.04,7384.44 h34
  text "Top Layer" at 11360,7287.69 h34
  text "(.GTL)" at 12255.81,7287.69 h34
  text "1.4mil" at 12819.33,7287.69 h34
  text "FR-4" at 13422.04,7239.31 h34
  text "Bottom Layer" at 11360,7190.94 h34
  text "(.GBL)" at 12255.81,7190.94 h34
  text "1.4mil" at 12819.33,7190.94 h34
  text "Bottom Solder Mask" at 11360,7094.19 h34
  text "(.GBS)" at 12255.81,7094.19 h34
  text "Solder Resist" at 13422.04,7094.19 h34
  text ".Layer_Name" at 577,-858.49 h60
M13 Component Bodies Top:
  text ".Layer_Name" at 577,-858.49 h60
M14 Component Bodies Bottom:
  text ".Layer_Name" at 577,-858.49 h60
M15 Courtyards Top:
  text ".Layer_Name" at 577,-858.49 h60
M16 Courtyards Bottom:
  text ".Layer_Name" at 577,-858.49 h60
Drill Drawing:
  text ".legend" at 5122.5,725.5 h60
  text "Drill Table" at 5147.5,540.5 h60
  text ".Layer_Name" at 577,-858.49 h60